# Allegro board fmc_tlu_cfd_01.brd
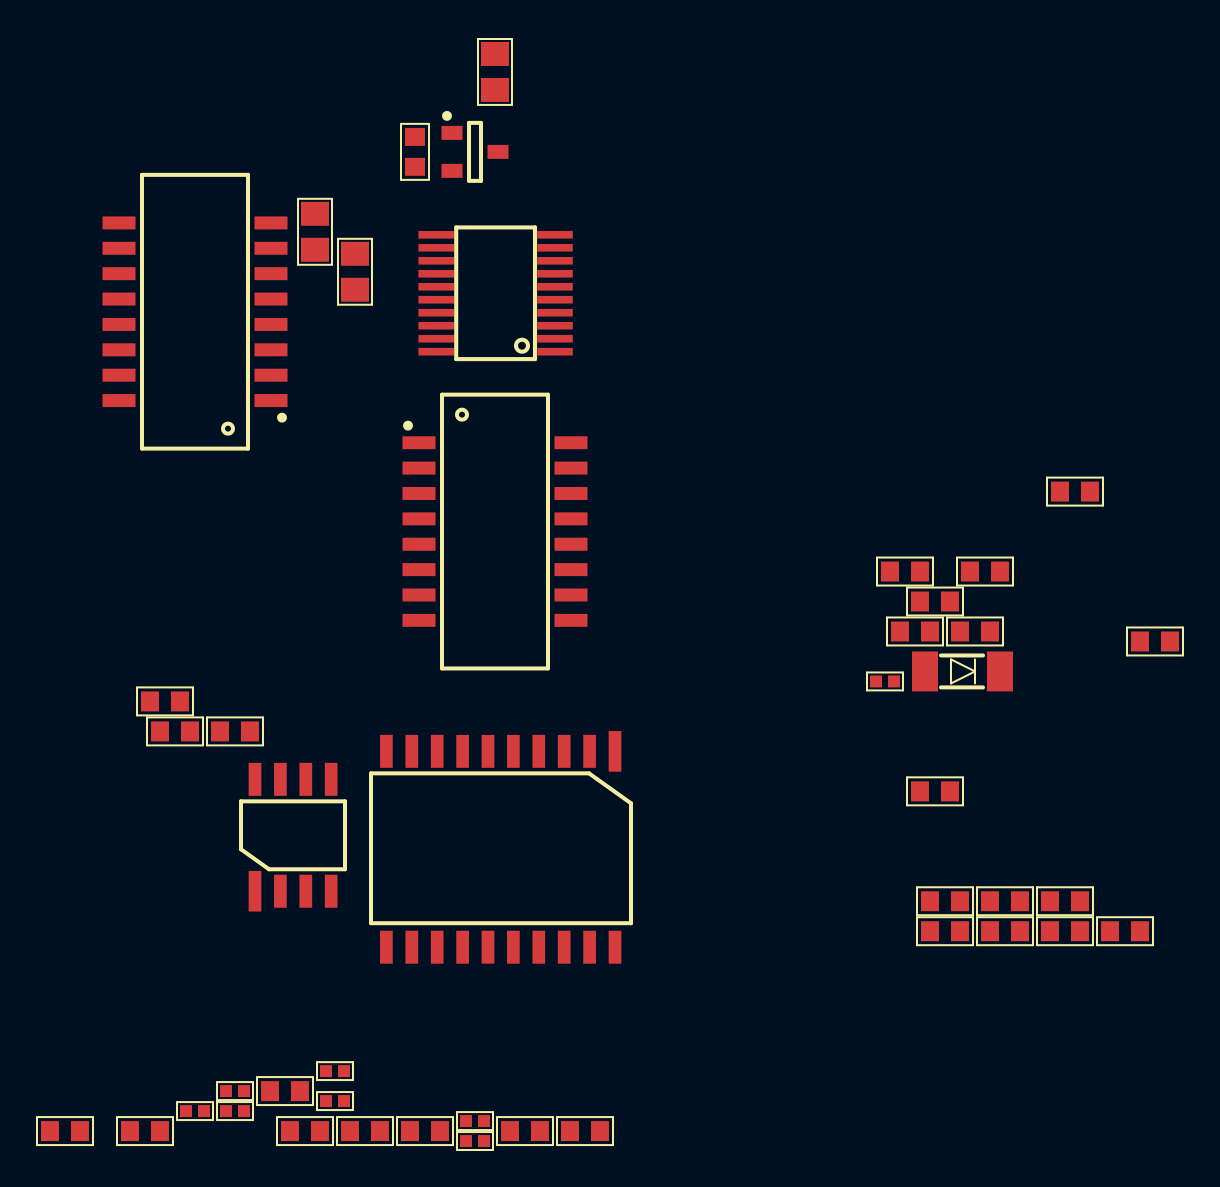
[diagram p0: board, top side]
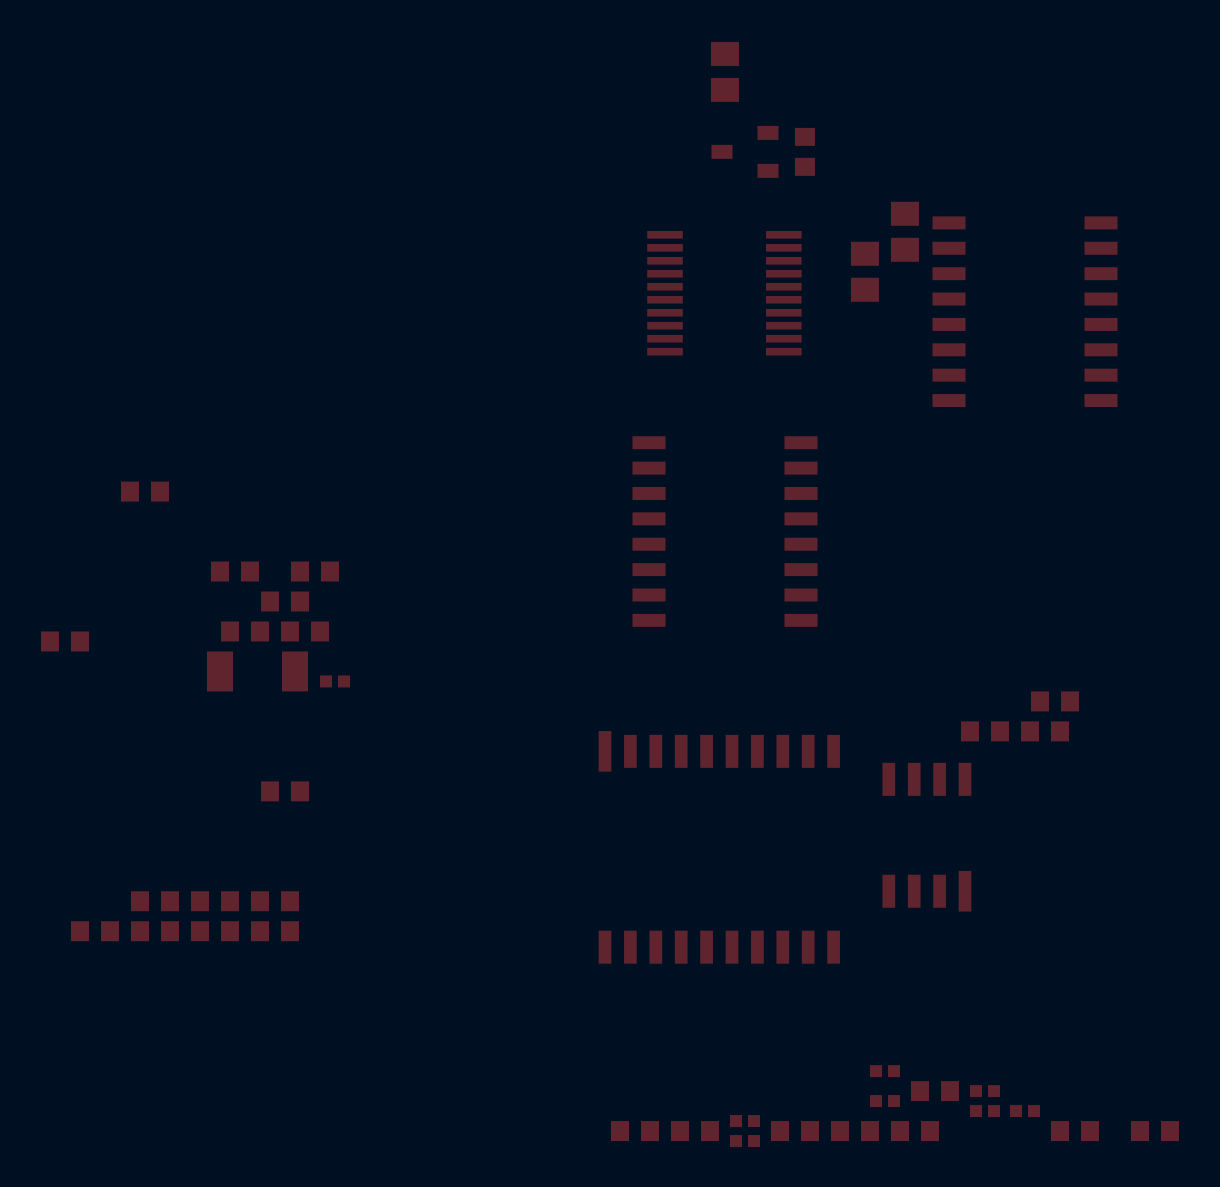
[diagram p1: board, bottom side, seen from below]

No outline. copper layers: TOP, LAYER2, LAYER3, LAYER4, LAYER5, BOTTOM. Coordinates in mm from the lowest, leftmost part position.

## Design rules (mm)
net group BEAM_TRIGGER: nets LEADING_EDGE_OUT
net group BEAM_TRIGGER*: nets LEADING_EDGE_OUT*
net group BEAM_TRIGGER_CFD: nets CFD_OUT
net group BEAM_TRIGGER_CFD*: nets CFD_OUT*
net group RST_LVDS: nets RST_LVDS
net group RST_LVDS*: nets RST_LVDS*

## Placement (name value [footprint] x y rotation side)
C1  100nF  [C0603]  17.5 49.5 270 top
C2  10nF  [C0603]  11 2.5 0 top
C3  1.0uF  [C0603]  44 12 0 top
C4  1.0uF  [C0603]  50 12 0 top
C5  1.0uF  [C0603]  47 12 0 top
C6  100nF  [C0603]  53 10.5 0 top
C7  100nF  [C0603]  47 10.5 0 top
C8  100nF  [C0603]  50 10.5 0 top
C9  100nF  [C0603]  44 10.5 0 top
D1  -  [SOT95P240X130-3N]  20.5 49.5 0 top
D2  -  [SOD80]  43 23.5 0 top
IC1  -  [SOIC127P835X237-16N]  6.5 41.5 180 top
IC2  -  [TSSOP20MA_065]  24.5 39.5 90 top
IC3  -  [SOIC127P835X237-16N]  21.5 30.5 0 top
R1  51  [C0402]  41 23 0 top
R2  12  [C0805]  21.5 53.5 270 top
R3  51  [C0603]  8.5 20.5 0 top
R4  51  [C0402]  13.5 3.5 0 top
R5  100  [C0603]  4 0.5 0 top
R6  100  [C0603]  54.5 25 0 top
R7  100  [C0805]  12.5 45.5 270 top
R8  100  [C0603]  5 22 0 top
R9  100  [C0805]  14.5 43.5 90 top
R10  33k  [C0603]  0 0.5 0 top
R11  XX  [C0603]  5.5 20.5 0 top
R12  100  [C0603]  50.5 32.5 0 top
R13  100  [C0603]  43.5 17.5 0 top
R14  1k  [C0603]  46 28.5 0 top
R15  51  [C0402]  8.5 1.5 0 top
R16  82  [C0402]  6.5 1.5 0 top
R17  1k  [C0603]  23 0.5 0 top
R18  51  [C0402]  8.5 2.5 0 top
R19  51  [C0402]  20.5 0 0 top
R20  82  [C0402]  13.5 2 0 top
R21  51  [C0402]  20.5 1 0 top
R22  75  [C0603]  18 0.5 0 top
R23  75  [C0603]  12 0.5 0 top
R24  75  [C0603]  15 0.5 0 top
R25  75  [C0603]  26 0.5 0 top
R26  75  [C0603]  43.5 27 0 top
R27  75  [C0603]  42 28.5 0 top
R28  75  [C0603]  42.5 25.5 0 top
R29  75  [C0603]  45.5 25.5 0 top
U1  -  [SOIC8]  9.5 12.5 0 top
U2  -  [SOIC20W_127]  27.5 19.5 180 top

## Library data of the parts
C1 C6-C9 = CAPCERSMDCL2: part number: CAPCERSMDCL2_0603-100NF,16V; tolerance: 10%
C2 = CAPCERSMDCL2: part number: CAPCERSMDCL2_0603-10NF,50V; tolerance: 10%
C3-C5 = CAPCERSMDCL2: part number: CAPCERSMDCL2_0603-1.0UF,6.3V; tolerance: 10%
D1 = DIODE_DUAL_SERIES: part number: HBAT-540C
D2 = DIODE: part number: DIODE_SI-1N4148_CMS
IC1 = DELAY_LINE_GL2L: part number: GL2L5LS050D-C
IC2 = MAX9601
IC3 = DELAY_LINE_GL2L: part number: GL2L5LS100D-C
R1 R4 R15 R18 R19 R21 = RSMD0402: part number: RSMD0402_1/16W-51,1%; tolerance: 1%
R2 = RSMD0805: part number: RSMD0805_125MW-12,1%; tolerance: 1%
R3 = RSMD0603: part number: RSMD0603_1/10W-51,1%; tolerance: 1%
R5 R6 R8 R12 R13 = RSMD0603: part number: RSMD0603_1/10W-100,1%; tolerance: 1%
R7 R9 = RSMD0805: part number: RSMD0805_125MW-100,1%; tolerance: 1%
R10 = RSMD0603: part number: RSMD0603_1/10W-33K,1%; tolerance: 1%
R11 = RSMD0603: part number: RSMD0603_1/10W-XX,1%; tolerance: 1%
R14 R17 = RSMD0603: part number: RSMD0603_1/10W-1K,1%; tolerance: 1%
R16 R20 = RSMD0402: part number: RSMD0402_1/16W-82,1%; tolerance: 1%
R22-R29 = RSMD0603: part number: RSMD0603_1/10W-75,1%; tolerance: 1%
U1 = SN65LVDT101DG4: part number: SN65LVDT101DG4_SOIC-TEXAS INSTRUMENTS
U2 = MC100EL29: part number: MC100LVEL29DWG

## Footprints (pads in the part's own frame, mm; a bottom-side part is the same pattern mirrored in y, then rotated)
C0402
  rect 0.6x0.6 smd: 1(-0.45,0) 2(0.45,0)
C0603
  rect 0.9x1 smd: 1(-0.75,0) 2(0.75,0)
C0805
  rect 1.2x1.4 smd: 1(-0.9,0) 2(0.9,0)
SOD80
  rect 1.3x2 smd: 1(0,0) 2(3.75,0)
SOIC8
  rect 0.635x2.032 smd: 1(0,0)
  rect 0.635x1.651 smd: 2(1.27,0) 3(2.54,0) 4(3.81,0) 5(3.81,5.6) 6(2.54,5.6) 7(1.27,5.6) 8(0,5.6)
SOIC20W_127
  rect 0.635x2.032 smd: 1(0,0)
  rect 0.635x1.651 smd: 2(1.27,0) 3(2.54,0) 4(3.81,0) 5(5.08,0) 6(6.35,0) 7(7.62,0) 8(8.89,0) 9(10.16,0) 10(11.43,0) 11(11.43,9.8) 12(10.16,9.8) 13(8.89,9.8) 14(7.62,9.8) 15(6.35,9.8) 16(5.08,9.8) 17(3.81,9.8) 18(2.54,9.8) 19(1.27,9.8) 20(0,9.8)
SOIC127P835X237-16N
  rect 1.65x0.65 smd: 1(-3.8,4.445) 2(-3.8,3.175) 3(-3.8,1.905) 4(-3.8,0.635) 5(-3.8,-0.635) 6(-3.8,-1.905) 7(-3.8,-3.175) 8(-3.8,-4.445) 9(3.8,-4.445) 10(3.8,-3.175) 11(3.8,-1.905) 12(3.8,-0.635) 13(3.8,0.635) 14(3.8,1.905) 15(3.8,3.175) 16(3.8,4.445)
SOT95P240X130-3N
  rect 1.05x0.7 smd: 1(-1.15,0.95) 2(-1.15,-0.95) 3(1.15,0)
TSSOP20MA_065
  rect 0.381x1.778 smd: 1(0,0) 2(0.65,0) 3(1.3,0) 4(1.95,0) 5(2.6,0) 6(3.25,0) 7(3.9,0) 8(4.55,0) 9(5.2,0) 10(5.85,0) 11(5.85,5.94) 12(5.2,5.94) 13(4.55,5.94) 14(3.9,5.94) 15(3.25,5.94) 16(2.6,5.94) 17(1.95,5.94) 18(1.3,5.94) 19(0.65,5.94) 20(0,5.94)

## Nets
GND_SIGNAL: C2.1(A<0>) C3.1(A<0>) C4.1(A<0>) C5.1(A<0>) C6.1(A<0>) C7.1(A<0>) C8.1(A<0>) C9.1(A<0>) IC1.1(SH<0>) IC1.3(SH<1>) IC1.4(SH<2>) IC1.5(SH<3>) IC1.6(SH<4>) IC1.8(SH<5>) IC1.9(SH<6>) IC1.11(SH<7>) IC1.12(SH<8>) IC1.13(SH<9>) IC1.14(SH<10>) IC1.16(SH<11>) IC2.4(LE<0>) IC2.17(LE<0>) IC3.1(SH<0>) IC3.3(SH<1>) IC3.4(SH<2>) IC3.5(SH<3>) IC3.6(SH<4>) IC3.8(SH<5>) IC3.9(SH<6>) IC3.11(SH<7>) IC3.12(SH<8>) IC3.13(SH<9>) IC3.14(SH<10>) IC3.16(SH<11>) R1.1(A<0>) R4.1(A<0>) R7.1(A<0>) R8.1(A<0>) R9.1(A<0>) R10.1(A<0>) R11.1(A<0>) R12.1(A<0>) R13.1(A<0>) R14.1(A<0>) R16.1(A<0>) R17.1(A<0>) R20.1(A<0>) R23.1(A<0>) R25.1(A<0>) R27.1(A<0>) R29.1(A<0>) U1.5(GND) U2.11
P3V3: C5.2(B<0>) C8.2(B<0>) D2.1(A<0>) IC2.3(VCCO_<0>) IC2.5(LE*<0>) IC2.16(LE*<0>) IC2.18(VCCO_<1>) U1.8(V_CC) U2.14 U2.19
P5V: C1.2(B<0>) C3.2(B<0>) C6.2(B<0>) C9.2(B<0>) D1.2(C) IC2.7(VCC<0>) IC2.14(VCC<1>)
VIN: R2.1(A<0>)
CFD_OUT: R28.1(A<0>) R29.2(B<0>)
CFD_OUT*: R26.1(A<0>) R27.2(B<0>)
LEADING_EDGE_OUT: R24.1(A<0>) R25.2(B<0>)
LEADING_EDGE_OUT*: R22.1(A<0>) R23.2(B<0>)
M5V: C1.1(A<0>) C4.2(B<0>) C7.2(B<0>) D1.1(A) IC2.6(VEE<0>) IC2.15(VEE<1>)
RST_LVDS: R6.2(B<0>) U1.2(A)
RST_LVDS*: R6.1(A<0>) U1.3(B)
UNNAMED_1_CAPCERSMDCL2_I78_B: C2.2(B<0>) IC2.10(IN+<0>) R5.2(B<0>)
UNNAMED_1_DELAYLINEGL2L_I140_A1: D1.3(AC) IC1.2(A1) IC2.9(IN-<0>) R2.2(B<0>) R3.1(A<0>)
UNNAMED_1_DELAYLINEGL2L_I140_A2: IC1.15(A2) R1.2(B<0>)
UNNAMED_1_DELAYLINEGL2L_I140_B2: IC1.10(B2) R4.2(B<0>)
UNNAMED_1_DELAYLINEGL2L_I141_B1: IC3.7(B1) R21.2(B<0>) U2.3(CLOCK<0>)
UNNAMED_1_DELAYLINEGL2L_I141_B2: IC3.10(B2) R19.2(B<0>) U2.4(CLOCK*<0>)
UNNAMED_1_MAX9601_I1_HYS: IC2.13(HYS<0>) R11.2(B<0>)
UNNAMED_1_MAX9601_I1_IN: IC2.11(IN+<0>) R3.2(B<0>) R8.2(B<0>)
UNNAMED_1_MAX9601_I1_IN_1: IC1.7(B1) IC2.12(IN-<0>) R7.2(B<0>) R9.2(B<0>)
UNNAMED_1_MAX9601_I1_Q: IC2.19(Q*<0>) IC3.15(A2)
UNNAMED_1_MAX9601_I1_Q_1: IC2.20(Q<0>) IC3.2(A1)
UNNAMED_1_MAX9601_I71_HYS: IC2.8(HYS<0>) R10.2(B<0>)
UNNAMED_1_MAX9601_I71_Q: IC2.2(Q*<0>) R15.2(B<0>) U2.9(CLOCK*<0>)
UNNAMED_1_MAX9601_I71_Q_1: IC2.1(Q<0>) R18.2(B<0>) U2.8(CLOCK<0>)
UNNAMED_1_MC100EL29_I58_CL: R13.2(B<0>) U1.7(Y) U2.10(CL<0>) U2.20(CL<0>)
UNNAMED_1_MC100EL29_I58_D: D2.2(K<0>) R14.2(B<0>) U2.6(D<0>)
UNNAMED_1_MC100EL29_I58_D_1: R17.2(B<0>) U2.7(D*<0>)
UNNAMED_1_MC100EL29_I58_Q: R24.2(B<0>) U2.1(D<0>) U2.13(Q<0>)
UNNAMED_1_MC100EL29_I58_Q_1: R22.2(B<0>) U2.2(D*<0>) U2.12(Q*<0>)
UNNAMED_1_MC100EL29_I87_Q: R28.2(B<0>) U2.18(Q<0>)
UNNAMED_1_MC100EL29_I87_Q_1: R26.2(B<0>) U2.17(Q*<0>)
UNNAMED_1_RSMD0402_I127_A: R19.1(A<0>) R20.2(B<0>) R21.1(A<0>)
UNNAMED_1_RSMD0402_I136_A: R15.1(A<0>) R16.2(B<0>) R18.1(A<0>)
UNNAMED_1_RSMD0603_I96_B: R12.2(B<0>) U1.6(Z)
VTHRESH: R5.1(A<0>)

Pads without a net: U1 1 4; U2 5 15 16
